# Altium PCB SPI_Board.PcbDoc (part 1 of 2)
Units mil, origin at the board's own origin, x right, y up, seen from the top; angles counter-clockwise.
Board outline 3600 x 5100 mil, 2 copper layers (Top Layer, Bottom Layer); 50 components, 221 nets, 541 pads, 190 vias.
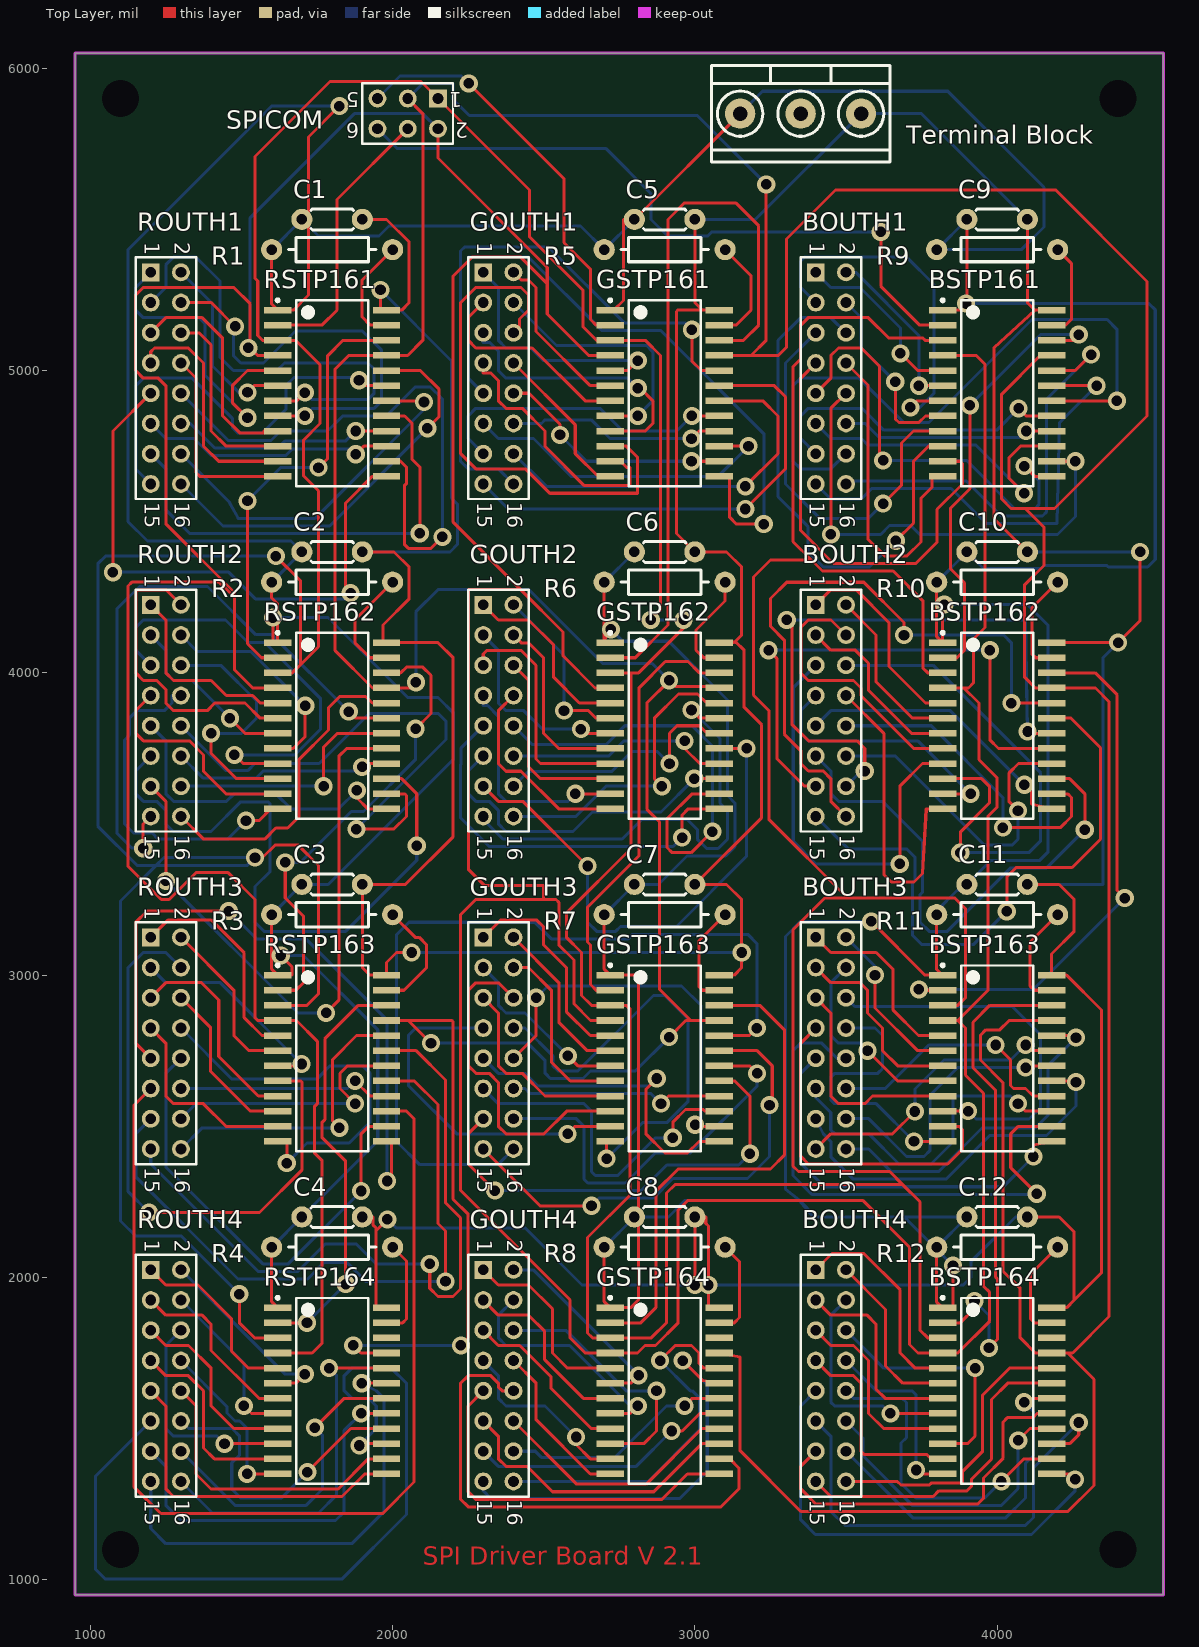
[diagram p0: Top Layer view]
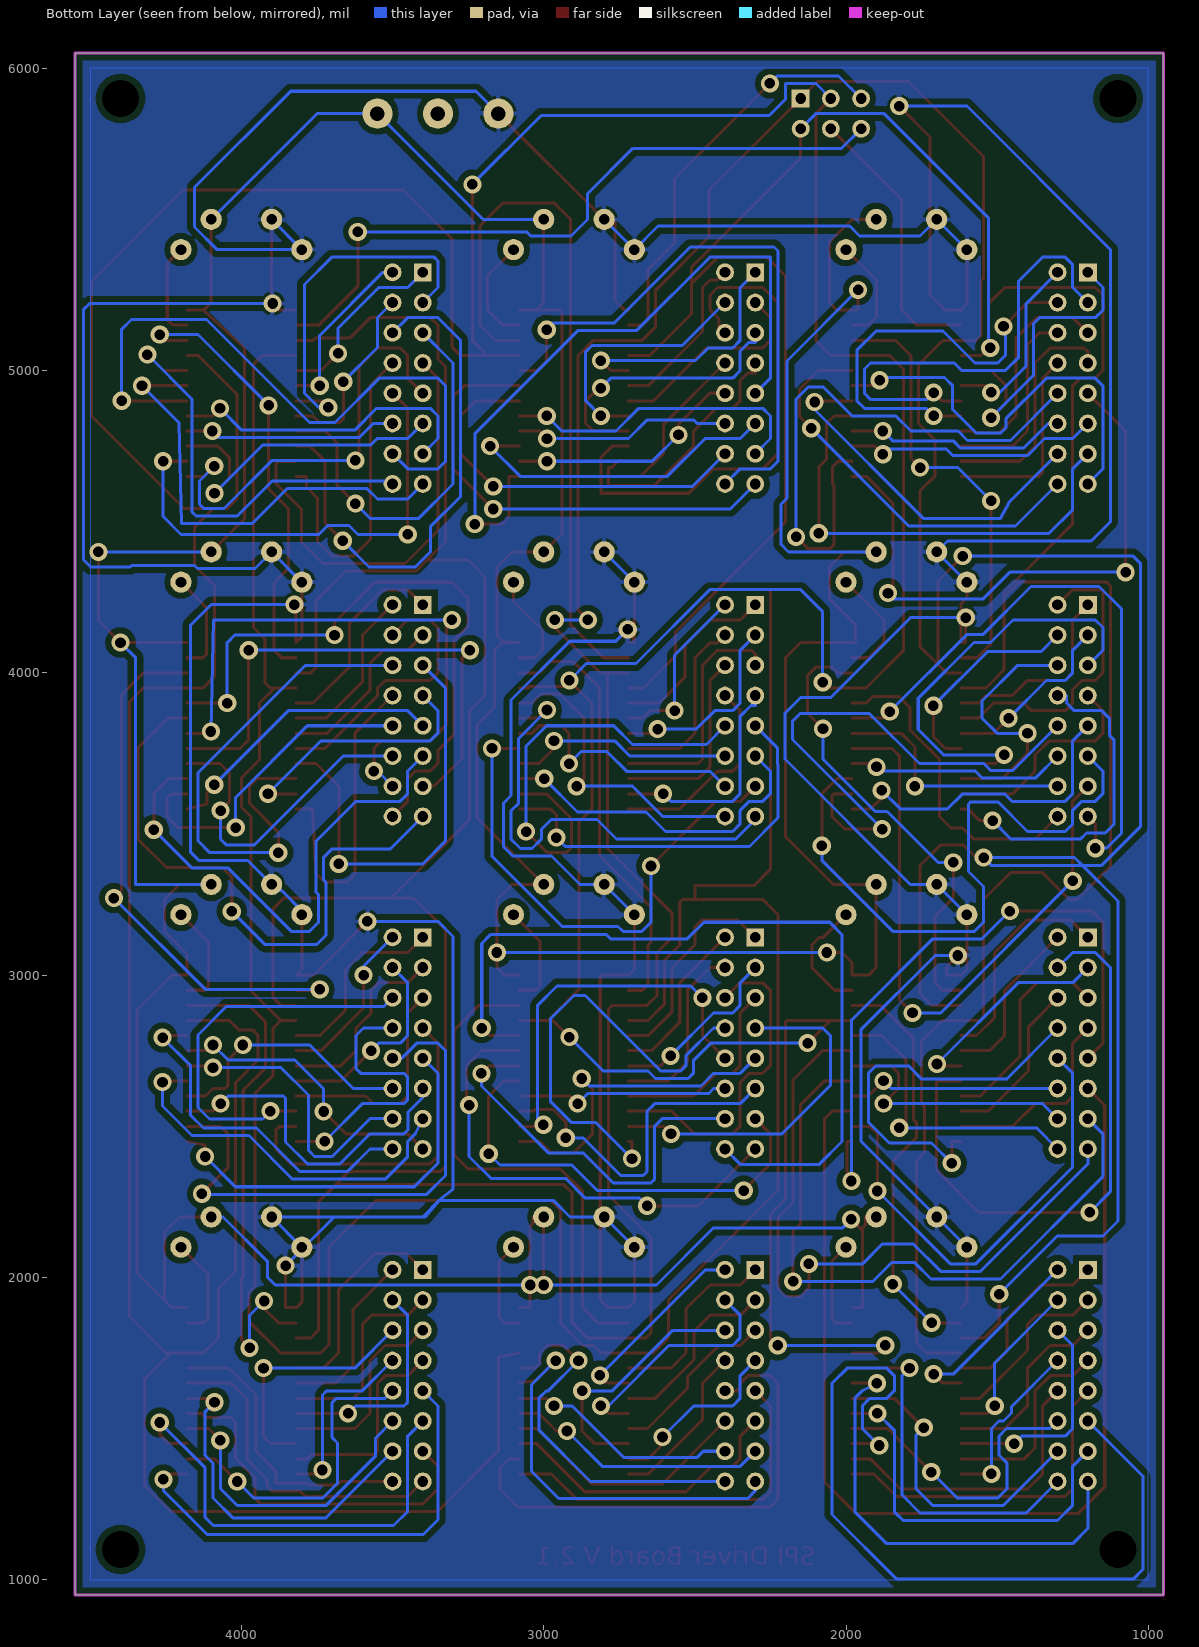
[diagram p1: Bottom Layer view, seen from below]

## Layer stack, top to bottom
Top Layer: signal copper 1.4
Dielectric: dielectric 12.6, FR-4, Dk 4.8
Bottom Layer: signal copper 1.4

## Board outline
950,950 950,6050 4550,6050 4550,950 950,950

## Design rules (kind name [scope] priority, off if disabled: settings)
Clearance poly_rule [InPolygon] p1: gap=20
Clearance [All] p2: gap=15
PolygonConnect [All] p1: connectstyle=Relief reliefconductorwidth=15 reliefentries=4 polygonreliefangle="90 Angle" airgapwidth=10
RoutingTopology [All] p1: topology=Daisy_MidDriven
RoutingVias [All] p1: holewidth=35 width=60 viastyle="Through Hole" minholewidth=35 minwidth=60 maxholewidth=35 maxwidth=60
SolderMaskExpansion [All] p1: expansion=4
Width [All] p1: maxlimit=10 minlimit=10 preferedwidth=10
27 further rules are at their usual default settings.

## Components (designator, comment, footprint, x,y, rotation, side; value= is the part's Value field where it differs from the comment)
BOUTH1 "Header 8X2" HDR2X8 3400,5325 r270 top
BOUTH2 "Header 8X2" HDR2X8 3400,4225 r270 top
BOUTH3 "Header 8X2" HDR2X8 3400,3125 r270 top
BOUTH4 "Header 8X2" HDR2X8 3400,2025 r270 top
BSTP161 "STP16CP05MTR" STP16CP05MTR-24N 4000,4925 r0 top
BSTP162 "STP16CP05MTR" STP16CP05MTR-24N 4000,3825 r0 top
BSTP163 "STP16CP05MTR" STP16CP05MTR-24N 4000,2725 r0 top
BSTP164 "STP16CP05MTR" STP16CP05MTR-24N 4000,1625 r0 top
C1 "Cap" RAD0.2A 1700,5500 r90 top
C2 "Cap" RAD0.2A 1700,4400 r90 top
C3 "Cap" RAD0.2A 1700,3300 r90 top
C4 "Cap" RAD0.2A 1700,2200 r90 top
C5 "Cap" RAD0.2A 2800,5500 r90 top
C6 "Cap" RAD0.2A 2800,4400 r90 top
C7 "Cap" RAD0.2A 2800,3300 r90 top
C8 "Cap" RAD0.2A 2800,2200 r90 top
C9 "Cap" RAD0.2A 3900,5500 r90 top
C10 "Cap" RAD0.2A 3900,4400 r90 top
C11 "Cap" RAD0.2A 3900,3300 r90 top
C12 "Cap" RAD0.2A 3900,2200 r90 top
GOUTH1 "Header 8X2" HDR2X8 2300,5325 r270 top
GOUTH2 "Header 8X2" HDR2X8 2300,4225 r270 top
GOUTH3 "Header 8X2" HDR2X8 2300,3125 r270 top
GOUTH4 "Header 8X2" HDR2X8 2300,2025 r270 top
GSTP161 "STP16CP05MTR" STP16CP05MTR-24N 2900,4925 r0 top
GSTP162 "STP16CP05MTR" STP16CP05MTR-24N 2900,3825 r0 top
GSTP163 "STP16CP05MTR" STP16CP05MTR-24N 2900,2725 r0 top
GSTP164 "STP16CP05MTR" STP16CP05MTR-24N 2900,1625 r0 top
R1 "Res1" AXIAL0.4 2000,5400 r270 top
R2 "Res1" AXIAL0.4 2000,4300 r270 top
R3 "Res1" AXIAL0.4 2000,3200 r270 top
R4 "Res1" AXIAL0.4 2000,2100 r270 top
R5 "Res1" AXIAL0.4 3100,5400 r270 top
R6 "Res1" AXIAL0.4 3100,4300 r270 top
R7 "Res1" AXIAL0.4 3100,3200 r270 top
R8 "Res1" AXIAL0.4 3100,2100 r270 top
R9 "Res1" AXIAL0.4 4200,5400 r270 top
R10 "Res1" AXIAL0.4 4200,4300 r270 top
R11 "Res1" AXIAL0.4 4200,3200 r270 top
R12 "Res1" AXIAL0.4 4200,2100 r270 top
ROUTH1 "Header 8X2" HDR2X8 1200,5325 r270 top
ROUTH2 "Header 8X2" HDR2X8 1200,4225 r270 top
ROUTH3 "Header 8X2" HDR2X8 1200,3125 r270 top
ROUTH4 "Header 8X2" HDR2X8 1200,2025 r270 top
RSTP161 "STP16CP05MTR" STP16CP05MTR-24N 1800,4925 r0 top
RSTP162 "STP16CP05MTR" STP16CP05MTR-24N 1800,3825 r0 top
RSTP163 "STP16CP05MTR" STP16CP05MTR-24N 1800,2725 r0 top
RSTP164 "STP16CP05MTR" STP16CP05MTR-24N 1800,1625 r0 top
SPICOM "Header 3X2" HDR2X3 2150,5900 r180 top
"Terminal Block" "3 way Terminal Block" PCTB3N 3550,5850 r180 top

## Footprints (in the part's own frame and the unit in brackets; to place one, negate y for a bottom-side part, rotate by r counter-clockwise, add the part's x,y. Pads: shape width x height; smd on the part's side, far side on the other; paste and mask are expansions set on the pad)
AXIAL0.4 [mil]
  round 70 hole 35: 1(0,0) 2(0,-400)
  silkscreen extent -40,-345 40,-55
HDR2X3 [mm] "Connector; Header; 3x2 Position"
  rect 1.5x1.5 hole 0.9: 1(0,0)
  round 1.5 hole 0.9: 2(0,2.54) 3(2.54,0) 4(2.54,2.54) 5(5.08,0) 6(5.08,2.54)
  silkscreen extent -1.27,-1.27 6.35,3.81
HDR2X8 [mm] "Connector; Header; 8x2 Position"
  rect 1.5x1.5 hole 0.9: 1(0,0)
  round 1.5 hole 0.9: 2(0,2.54) 3(2.54,0) 4(2.54,2.54) 5(5.08,0) 6(5.08,2.54) 7(7.62,0) 8(7.62,2.54) 9(10.16,0) 10(10.16,2.54) 11(12.7,0) 12(12.7,2.54) 13(15.24,0) 14(15.24,2.54) 15(17.78,0) 16(17.78,2.54)
  silkscreen extent -1.27,-1.27 19.05,3.81
PCTB3N [mil]
  round 100 hole 48: 1(0,0) 2(200,0) 3(400,0)
  silkscreen extent -95,-160 495,160
RAD0.2A [mil]
  round 70 hole 35: 1(0,0) 2(0,-200)
  silkscreen extent -35,-170 35,-30
STP16CP05MTR-24N [mm] "SOIC, 24-Leads, Body 15.40x7.50mm, Pitch 1.27mm, IPC Medium Density"
  rect 2.3x0.55 smd: 1(-4.575,6.985) 2(-4.575,5.715) 3(-4.575,4.445) 4(-4.575,3.175) 5(-4.575,1.905) 6(-4.575,0.635) 7(-4.575,-0.635) 8(-4.575,-1.905) 9(-4.575,-3.175) 10(-4.575,-4.445) 11(-4.575,-5.715) 12(-4.575,-6.985) 13(4.575,-6.985) 14(4.575,-5.715) 15(4.575,-4.445) 16(4.575,-3.175) 17(4.575,-1.905) 18(4.575,-0.635) 19(4.575,0.635) 20(4.575,1.905) 21(4.575,3.175) 22(4.575,4.445) 23(4.575,5.715) 24(4.575,6.985)
  silkscreen extent -4.7,-7.8 3.02,7.93, body extent -3.8,-7.8 3.8,7.8, height 2.65

## Part data
BOUTH1 BOUTH2 BOUTH3 BOUTH4 GOUTH1 GOUTH2 GOUTH3 GOUTH4 ROUTH1 ROUTH2 ROUTH3 ROUTH4: "Header, 8-Pin, Dual row"
C1 C2 C3 C4 C5 C6 C7 C8 C9 C10 C11 C12: "Capacitor"
R1 R2 R3 R4 R5 R6 R7 R8 R9 R10 R11 R12: "Resistor"
SPICOM: "Header, 3-Pin, Dual row"
"Terminal Block": library part Component_1

## Free pads (board coordinates)
  round 60 hole 123: 0(4400,5900) 1(4400,1100) 2(1100,1100) 3(1100,5900)

## Via types
v1: diameter 60, hole 35, Top Layer to Bottom Layer, 190 vias

## Nets (pads, with @x,y where several pads share a name; then routed paths per layer and width w, separated by ;. In a path a pad name is that pad's centre, name@x,y a point inside that pad or via, vN(x,y) a via of type N, cw(c..) or ccw(c..) an arc to the next point about the centre after c; other vN are vias at no path point)
3.3VCC: "Terminal Block.1" BSTP161.24 BSTP162.24 BSTP163.24 BSTP164.24 C1.2 C2.2 C3.2 C4.2 C5.2 C6.2 C7.2 C8.2 C9.2 C10.2 C11.2 C12.2 GSTP161.24 GSTP162.24 GSTP163.24 GSTP164.24 RSTP161.24 RSTP162.24 RSTP163.24 RSTP164.24 | length 18453.1
  Top Layer w10: C4.2@1900,2200 1936,2200 1936,2173 1945,2164 1945,2154 ; C2.2@1900,4400 2005,4400 2055,4350 2055,4245 1968,4158 1968,4100 RSTP162.24@1980.12,4100 2150.47,4100 2200.47,4050 2200.47,3458.23 2042.24,3300 C3.2@1900,3300 1900,3025 1925,3000 RSTP163.24@1980.12,3000 1980.12,3042.12 2013,3075 v1(2063,3075) ; C1.2@1900,5500 1980,5500 2055,5425 2055,5225 2030,5200 RSTP161.24@1980.12,5200 1960,5200 v1(1960,5267) ; RSTP164.24@1980.12,1900 1945,1900 1945,2154 ; v1(1983,2192) 1945,2154 ; v1(3000,1975) C8.2@3000,2200 3036,2200 3036,2179 3045,2170 v1(3045,1975) 3045,1900 GSTP164.24@3080.12,1900 ; C5.2@3000,5500 3000,5225 3025,5200 ; GSTP163.24@3080.12,3000 3130,3000 3155,3025 v1(3155,3075) 3155,3250 3105,3300 C7.2@3000,3300 3221,3521 3221,3828 3163,3886 3163,4075 3134,4104 ; GSTP161.24@3080.12,5200 3025,5200 ; C12.2@4100,2200 4205,2200 4255,2150 4255,1925 ; C11.2@4100,3300 4205,3300 4255,3250 4255,3145 4180,3070 4180,3000 BSTP163.24@4180.12,3000 4230,3000 4345.39,2884.61 4345.39,2015.39 4255,1925 ; C10.2@4100,4400 3989.84,4510.16 3989.84,5075.84 4125,5200 ; C9.2@4100,5500 4100,5225 4125,5200 ; BSTP164.24@4180.12,1900 4230,1900 4255,1925 ; BSTP162.24@4180.12,4100 v1(4400,4100) 4473,4173 v1(4473,4400) ; BSTP161.24@4180.12,5200 4125,5200 ; 3025,5200 2943.35,5200 2939,5195.65 2939,4461 C6.2@3000,4400 3105,4400 3155,4350 3155,4125 3134,4104 ; 3134,4104 3130,4100 GSTP162.24@3080.12,4100 3134,4104
  Bottom Layer w10: C2.2@1900,4400 2190,4400 2215,4425 2215,4558 2195,4578 2195,5032 v1(1960,5267) ; v1(1983,2192) 2011,2164 2438,2164 2627,1975 v1(3000,1975) ; v1(2063,3075) v1(3155,3075) ; C5.2@3000,5500 3200,5500 3550,5850 3750,5850 C9.2@4100,5500 ; v1(3045,1975) 3888,1975 3913,2000 3913,2052 4061,2200 C12.2@4100,2200 ; C11.2@4100,3300 4350,3300 4350,4050 v1(4400,4100) ; C10.2@4100,4400 v1(4473,4400)
BLUESPI: BSTP161.2 SPICOM.6 | length 2306
  Top Layer w10: v1(3615,5459) 3615,5279 3744,5150 BSTP161.2@3819.88,5150
  Bottom Layer w10: SPICOM.6@1950,5800 2015,5735 2705,5735 2855,5585 2855,5500 2910,5445 3043,5445 3057,5459 v1(3615,5459)
BLUESPIOUT1: BSTP161.22 BSTP162.2 | length 1493.7
  Top Layer w10: BSTP162.2@3819.88,4050 3867,4050 3892,4075 3892,4298 3845,4345 3845,4544 3910.16,4609.16 3910.16,4884.84 v1(3910,4885) ; BSTP161.22@4180.12,5100 4251,5100 v1(4270,5119)
  Bottom Layer w10: v1(3910,4885) 4144,5119 v1(4270,5119)
BLUESPIOUT2: BSTP162.22 BSTP163.2 | length 1815.9
  Top Layer w10: v1(3741,2953) 3744,2950 BSTP163.2@3819.88,2950 ; BSTP162.22@4180.12,4000 4324.31,4000 4397,3927.31 4397,3280 v1(4422,3255)
  Bottom Layer w10: v1(3741,2953) 4120,2953 v1(4422,3255)
BLUESPIOUT3: BSTP163.22 BSTP164.2 | length 1729.2
  Top Layer w10: BSTP164.2@3819.88,1850 3877.5,1850 3925,1897.5 v1(3925,1922) ; v1(3973,1767) 4000.46,1794.46 4000.46,1996 3994,2002.46 3994,2620 3920,2694 3920,2844 3976,2900 BSTP163.22@4180.12,2900
  Bottom Layer w10: v1(3925,1922) 3973,1874 v1(3973,1767)
BOUT0: BOUTH1.1 BSTP161.5 | length 603.7
  Top Layer w10: v1(3680,5057) 3737,5000 BSTP161.5@3819.88,5000
  Bottom Layer w10: BOUTH1.1@3400,5325 3450,5275 3546,5275 3680,5141 v1(3680,5057)
BOUT1: BOUTH1.2 BSTP161.6 | length 572.6
  Top Layer w10: v1(3741,4950) BSTP161.6@3819.88,4950
  Bottom Layer w10: BOUTH1.2@3500,5325 3532.3,5325 3741,5116.3 v1(3741,4950)
BOUT2: BOUTH1.3 BSTP161.7 | length 1215.1
  Top Layer w10: v1(3713,4878) 3735,4900 BSTP161.7@3819.88,4900
  Bottom Layer w10: BOUTH1.3@3400,5225 3350,5275 3350,5362.5 3362.5,5375 3701,5375 3791,5285 3791,4925 3744,4878 v1(3713,4878)
BOUT3: BOUTH1.4 BSTP161.8 | length 623.5
  Top Layer w10: v1(3663,4963) 3663,4840 3675,4828 3741,4828 3763,4850 BSTP161.8@3819.88,4850
  Bottom Layer w10: BOUTH1.4@3500,5225 3549.53,5175.47 3549.53,5076.47 v1(3663,4963)
BOUT4: BOUTH1.5 BSTP161.9 | length 1311.1
  Top Layer w10: v1(3623,4560) 3683.36,4620.36 3683.36,4760.36 3723,4800 BSTP161.9@3819.88,4800
  Bottom Layer w10: BOUTH1.5@3400,5125 3300,5025 3300,4625 3415,4510 3573,4510 v1(3623,4560)
BOUT5: BOUTH1.6 BSTP161.10 | length 1769.6
  Top Layer w10: v1(3665,4437) 3723,4495 3723,4700 3773,4750 BSTP161.10@3819.88,4750
  Bottom Layer w10: BOUTH1.6@3500,5125 3450,5175 3350,5175 3275,5100 3275,4583 3375,4483 3375,4400 3425,4350 3578,4350 v1(3665,4437)
BOUT6: BOUTH1.7 BSTP161.11 | length 1463.2
  Top Layer w10: BOUTH1.7@3400,5025 3350,4975 3350,4470.95 3458.95,4362 3731,4362 3801,4432 3801,4540.84 3885.16,4625 3885.16,4691.84 3877,4700 BSTP161.11@3819.88,4700
BOUT7: BOUTH1.8 BSTP161.12 | length 1097.3
  Top Layer w10: BOUTH1.8@3500,5025 3573,4952 3573,4442 3628,4387 3702,4387 3748,4433 3748,4578 3785,4615 3785,4650 BSTP161.12@3819.88,4650
BOUT8: BOUTH1.9 BSTP161.13 | length 1496.5
  Top Layer w10: BOUTH1.9@3400,4925 3450,4975 3450,5050 3475,5075 3550,5075 3611,5014 3611,4715 v1(3623,4703) ; v1(4090,4684) 4124,4650 BSTP161.13@4180.12,4650
  Bottom Layer w10: v1(3623,4703) 3898.5,4703 4057.5,4544 4125,4544 4139,4558 4139,4635 v1(4090,4684)
BOUT9: BOUTH1.10 BSTP161.14 | length 1607.4
  Top Layer w10: v1(3450,4458) 3450,4875 BOUTH1.10@3500,4925 ; BSTP161.14@4180.12,4700 v1(4259,4700)
  Bottom Layer w10: v1(3450,4458) 3614.66,4458 3644.02,4487.37 3714.66,4487.37 3744.02,4458 4200,4458 4259,4517 v1(4259,4700)
BOUT10: BOUTH1.11 BSTP161.15 | length 1079.1
  Top Layer w10: v1(4089,4594) 4040,4643 4040,4712.5 4077.5,4750 BSTP161.15@4180.12,4750
  Bottom Layer w10: BOUTH1.11@3400,4825 3450,4775 3551,4775 3573,4753 3930,4753 v1(4089,4594)
BOUT11: BOUTH1.12 BSTP161.16 | length 708.7
  Top Layer w10: v1(4096,4800) BSTP161.16@4180.12,4800
  Bottom Layer w10: BOUTH1.12@3500,4825 3564,4825 3611,4778 4074,4778 v1(4096,4800)
BOUT12: BOUTH1.13 BSTP161.17 | length 1056.2
  Top Layer w10: v1(4071,4875) 4096,4850 BSTP161.17@4180.12,4850
  Bottom Layer w10: BOUTH1.13@3400,4725 3350,4775 3350,4850 3375,4875 3553,4875 3625,4803 3999,4803 v1(4071,4875)
BOUT13: BOUTH1.14 BSTP161.18 | length 2205.7
  Top Layer w10: BSTP161.18@4180.12,4900 v1(4396,4900)
  Bottom Layer w10: BOUTH1.14@3500,4725 3450,4675 3350,4675 3325,4700 3325,4950 3350,4975 3543.78,4975 3690.78,4828 3774.49,4828 4115.49,5169 4364,5169 4396,5137 v1(4396,4900)
BOUT14: BOUTH1.15 BSTP161.19 | length 1536.8
  Top Layer w10: BSTP161.19@4180.12,4950 v1(4329,4950)
  Bottom Layer w10: BOUTH1.15@3400,4625 3450,4575 3550,4575 3585,4610 3848,4610 3964,4494 4198,4494 4207,4828 v1(4329,4950)
BOUT15: BOUTH1.16 BSTP161.20 | length 1461.6
  Top Layer w10: BSTP161.20@4180.12,5000 4258,5000 v1(4311,5053)
  Bottom Layer w10: BOUTH1.16@3500,4625 3524.53,4625 3524.53,4635 3898,4635 4014,4519 4150,4519 4164,4533 4164,4906 v1(4311,5053)
BOUT16: BOUTH2.1 BSTP162.5 | length 680.5
  Top Layer w10: BOUTH2.1@3400,4225 3449.53,4274.53 3533.47,4274.53 3642,4166 3642,4021 3763,3900 BSTP162.5@3819.88,3900
BOUT17: BOUTH2.2 BSTP162.6 | length 566
  Top Layer w10: BOUTH2.2@3500,4225 3599.53,4125.47 3599.53,3970.47 3720,3850 BSTP162.6@3819.88,3850
BOUT18: BOUTH2.3 BSTP162.7 | length 606.8
  Top Layer w10: BOUTH2.3@3400,4125 3450,4075 3531,4075 3574.53,4031.47 3574.53,3942.26 3716.79,3800 BSTP162.7@3819.88,3800
BOUT19: BOUTH2.4 BSTP162.8 | length 918.4
  Top Layer w10: BOUTH2.4@3500,4125 3450.47,4174.53 3375,4174.53 3350.47,4150 3350.47,3999.53 3375,3975 3524.53,3975 3549.53,3950 3549.53,3924.53 3724.06,3750 BSTP162.8@3819.88,3750
BOUT20: BOUTH2.5 BSTP162.9 | length 1426.7
  Top Layer w10: v1(3678,3368) 3678,3625 3753,3700 BSTP162.9@3819.88,3700
  Bottom Layer w10: BOUTH2.5@3400,4025 3325.47,3950.47 3325.47,3442.53 3400,3368 v1(3678,3368)
BOUT21: BOUTH2.6 BSTP162.10 | length 1722.9
  Top Layer w10: BSTP162.10@3819.88,3650 3949,3650 3974,3625 3974,3569.17 3878,3473.17 v1(3878,3405)
  Bottom Layer w10: BOUTH2.6@3500,4025 3788.17,4025 4144,3669.17 4144,3444.17 4104.83,3405 v1(3878,3405)
BOUT22: BOUTH2.7 BSTP162.11 | length 882
  Top Layer w10: BSTP162.11@3819.88,3600 v1(3912,3600)
  Bottom Layer w10: BOUTH2.7@3400,3925 3350.47,3875.47 3350.47,3800 3375.47,3775 3737,3775 v1(3912,3600)
BOUT23: BOUTH2.8 BSTP162.12 | length 1062.5
  Top Layer w10: BOUTH2.8@3500,3925 3625,3800 3625,3333 3650,3308 3725,3308 3753,3336 3765.5,3550 BSTP162.12@3819.88,3550
BOUT24: BOUTH2.9 BSTP162.13 | length 954.2
  Top Layer w10: v1(4090,3630) 4114,3606 4114,3566 BSTP162.13@4180.12,3550
  Bottom Layer w10: BOUTH2.9@3400,3825 3450,3875 3845,3875 v1(4090,3630)
BOUT25: BOUTH2.10 BSTP162.14 | length 1093.1
  Top Layer w10: v1(4019,3488) 4209,3488 4246,3525 4246,3587.5 4233.5,3600 BSTP162.14@4180.12,3600
  Bottom Layer w10: BOUTH2.10@3500,3825 3782,3825 4019,3588 v1(4019,3488)
BOUT26: BOUTH2.11 BSTP162.15 | length 1731.3
  Top Layer w10: BSTP162.15@4180.12,3650 4240,3650 4290,3600 v1(4290,3481)
  Bottom Layer w10: BOUTH2.11@3400,3725 3450,3675 3450,3600 3475,3575 3621,3575 3753,3443 3753,3274 3745,3266 3745,3175 3775,3145 3835,3145 4045,3355 4164,3355 v1(4290,3481)
BOUT27: BOUTH2.12 BSTP162.16 | length 1083.8
  Top Layer w10: v1(4069,3544.17) 4039.84,3573.33 4039.84,3669.17 4070.67,3700 BSTP162.16@4180.12,3700
  Bottom Layer w10: BOUTH2.12@3500,3725 3663.17,3725 3958.17,3430 4049,3430 4069,3450 v1(4069,3544.17)
BOUT28: BOUTH2.13 BSTP162.17 | length 1780.6
  Top Layer w10: v1(3244,4075) 3271,4048 3271,3716.97 3362.97,3625 BOUTH2.13@3400,3625 ; v1(3976,4075) 3976,3778.65 4004.65,3750 BSTP162.17@4180.12,3750
  Bottom Layer w10: v1(3244,4075) v1(3976,4075)
BOUT29: BOUTH2.14 BSTP162.18 | length 2023.6
  Top Layer w10: v1(3304,4175) 3321,4158 3321,3830 3376,3775 3537,3775 3562,3750 v1(3562,3675) ; v1(4101,3806) 4107,3800 BSTP162.18@4180.12,3800
  Bottom Layer w10: v1(3304,4175) 4093,4175 v1(4101,3806) ; BOUTH2.14@3500,3625 3550,3675 v1(3562,3675)
BOUT30: BOUTH2.15 BSTP162.19 | length 1995.1
  Top Layer w10: v1(4032,3211) 4032,3325 4063,3356 4248,3356 4342,3450 4342,3752 4244,3850 BSTP162.19@4180.12,3850
  Bottom Layer w10: BOUTH2.15@3400,3525 3507,3418 3700,3418 3728,3390 3728,3315 3720,3307 3720,3132 3750,3102 3923,3102 v1(4032,3211)
BOUT31: BOUTH2.16 BSTP162.20 | length 2113.1
  Top Layer w10: BOUTH2.16@3500,3525 3450,3575 3450,3650 3425,3675 3375.47,3675 3350.47,3700 3350.47,3742.53 3296,3797 3296,4108 3250,4154 3250,4246 3303.75,4299.75 3558.89,4299.75 3692,4166.64 v1(3692,4125) ; v1(4047,3900) BSTP162.20@4180.12,3900
  Bottom Layer w10: v1(3692,4125) 4022,4125 4047,4100 v1(4047,3900)
BOUT32: BOUTH3.1 BSTP163.5 | length 633.6
  Top Layer w10: BOUTH3.1@3400,3125 3450,3075 3600,3075 3656,3019 3656,2884 3740,2800 BSTP163.5@3819.88,2800
BOUT33: BOUTH3.2 BSTP163.6 | length 556.1
  Top Layer w10: v1(3596,3000) 3596,2891 3737,2750 BSTP163.6@3819.88,2750
  Bottom Layer w10: BOUTH3.2@3500,3125 3596,3029 v1(3596,3000)
BOUT34: BOUTH3.3 BSTP163.7 | length 642.4
  Top Layer w10: BOUTH3.3@3400,3025 3450,2975 3546,2975 3571,2950 3571,2875 3621,2825 3621,2750 3671,2700 BSTP163.7@3819.88,2700
BOUT35: BOUTH3.4 BSTP163.8 | length 677.7
  Top Layer w10: v1(3571,2750) 3671,2650 BSTP163.8@3819.88,2650
  Bottom Layer w10: BOUTH3.4@3500,3025 3450,2975 3450,2800 3475,2775 3546,2775 v1(3571,2750)
BOUT36: BOUTH3.5 BSTP163.9 | length 736.3
  Top Layer w10: BOUTH3.5@3400,2925 3450,2875 3450,2600 3475,2575 3563,2575 3588,2600 BSTP163.9@3819.88,2600
BOUT37: BOUTH3.6 BSTP163.10 | length 1285.1
  Top Layer w10: BSTP163.10@3819.88,2550 v1(3904,2550)
  Bottom Layer w10: BOUTH3.6@3500,2925 3529,2896 4050,2896 4144,2802 4144,2562.5 4105.67,2524.17 3929.83,2524.17 v1(3904,2550)
BOUT38: BOUTH3.7 BSTP163.11 | length 1145.9
  Top Layer w10: BOUTH3.7@3400,2825 3350,2775 3350,2400.47 3375,2375.47 3836.47,2375.47 3886,2425 3886,2487.5 3873.5,2500 BSTP163.11@3819.88,2500
BOUT39: BOUTH3.8 BSTP163.12 | length 925.2
  Top Layer w10: v1(3725,2450) BSTP163.12@3819.88,2450
  Bottom Layer w10: BOUTH3.8@3500,2825 3596,2825 3621,2800 3621,2690.72 3605.28,2675 3462.5,2675 3450,2662.5 3450,2587.5 3462.5,2575 3600,2575 v1(3725,2450)
BOUT40: BOUTH3.9 BSTP163.13 | length 1310.3
  Top Layer w10: v1(4120,2400) 4120,2437.5 BSTP163.13@4180.12,2450
  Bottom Layer w10: BOUTH3.9@3400,2725 3350,2675 3350,2378 3428,2300 4020,2300 v1(4120,2400)
BOUT41: BOUTH3.10 BSTP163.14 | length 1830.7
  Top Layer w10: v1(4131,2277) 4045,2363 4045,2475 4070,2500 BSTP163.14@4180.12,2500
  Bottom Layer w10: BOUTH3.10@3500,2725 3470.04,2725 3420.04,2775 3350,2775 3325,2750 3325,2337 3387,2275 4129,2275 v1(4131,2277)
BOUT42: BOUTH3.11 BSTP163.15 | length 1133.8
  Top Layer w10: v1(4069,2575) 4094,2550 BSTP163.15@4180.12,2550
  Bottom Layer w10: BOUTH3.11@3400,2625 3400,2595.04 3449.53,2545.52 3449.53,2488 3462.53,2475 3575,2475 3675,2375 3781,2375 3854,2448 3854,2593 3861,2600 4044,2600 v1(4069,2575)
BOUT43: BOUTH3.12 BSTP163.16 | length 859.6
  Top Layer w10: v1(3995,2769) 4044,2720 4044,2635 4054,2625 4094,2625 4119,2600 BSTP163.16@4180.12,2600
  Bottom Layer w10: BOUTH3.12@3500,2625 3630,2625 3774,2769 v1(3995,2769)
BOUT44: BOUTH3.13 BSTP163.17 | length 1245.7
  Top Layer w10: BSTP163.17@4180.12,2650 4257,2650 v1(4261,2646)
  Bottom Layer w10: BOUTH3.13@3400,2525 3425,2475 3450,2450 3450,2399 3524,2325 3831,2325 3975.17,2469.17 4163.17,2469.17 4261,2567 v1(4261,2646)
BOUT45: BOUTH3.14 BSTP163.18 | length 963.4
  Top Layer w10: v1(4094,2694) 4100,2700 BSTP163.18@4180.12,2700
  Bottom Layer w10: BOUTH3.14@3500,2525 3575,2525 3700,2400 3758,2400 3778.28,2420.28 3778.28,2603.28 3869,2694 v1(4094,2694)
BOUT46: BOUTH3.15 BSTP163.19 | length 973.8
  Top Layer w10: BOUTH3.15@3400,2425 3450,2475 3654,2475 v1(3728,2549) ; v1(4094,2769) 4113,2750 BSTP163.19@4180.12,2750
  Bottom Layer w10: v1(3728,2549) 3728,2623 3824,2719 4044,2719 v1(4094,2769)
BOUT47: BOUTH3.16 BSTP163.20 | length 1154.9
  Top Layer w10: BSTP163.20@4180.12,2800 4254,2800 v1(4260.75,2793.25)
  Bottom Layer w10: BOUTH3.16@3500,2425 3575,2425 3650,2350 3806,2350 3950.17,2494.17 4125.67,2494.17 4169,2537.5 4169,2701.5 v1(4260.75,2793.25)
BOUT48: BOUTH4.1 BSTP164.5 | length 721.7
  Top Layer w10: BOUTH4.1@3400,2025 3454,2079 3559,2079 3679,1959 3679,1750 3729,1700 BSTP164.5@3819.88,1700
BOUT49: BOUTH4.2 BSTP164.6 | length 584.8
  Top Layer w10: BOUTH4.2@3500,2025 3631,1894 3631,1707 3688,1650 BSTP164.6@3819.88,1650
BOUT50: BOUTH4.3 BSTP164.7 | length 680.6
  Top Layer w10: BOUTH4.3@3400,1925 3450,1875 3570,1875 3599.53,1845.47 3599.53,1630.27 3629.8,1600 BSTP164.7@3819.88,1600
BOUT51: BOUTH4.4 BSTP164.8 | length 743.6
  Top Layer w10: v1(3647,1550) BSTP164.8@3819.88,1550
  Bottom Layer w10: BOUTH4.4@3500,1925 3450,1875 3450,1587.5 3462.5,1575 3622,1575 v1(3647,1550)
BOUT52: BOUTH4.5 BSTP164.9 | length 657.3
  Top Layer w10: BOUTH4.5@3400,1825 3450,1775 3525,1775 3574.53,1725.47 3574.53,1550 3624.53,1500 BSTP164.9@3819.88,1500
BOUT53: BOUTH4.6 BSTP164.10 | length 821.3
  Top Layer w10: BSTP164.10@3819.88,1450 3902,1450 3927,1475 v1(3927,1700)
  Bottom Layer w10: BOUTH4.6@3500,1825 3625,1700 v1(3927,1700)
BOUT54: BOUTH4.7 BSTP164.11 | length 686.3
  Top Layer w10: BOUTH4.7@3400,1725 3450,1675 3524.53,1675 3549.53,1650 3549.53,1425 3560.82,1413.71 3768.29,1413.71 3782,1400 BSTP164.11@3819.88,1400
BOUT55: BOUTH4.8 BSTP164.12 | length 620.6
  Top Layer w10: v1(3732,1363) 3745,1350 BSTP164.12@3819.88,1350
  Bottom Layer w10: BOUTH4.8@3500,1725 3600,1625 3718.18,1625 3732,1611.18 v1(3732,1363)
BOUT56: BOUTH4.9 BSTP164.13 | length 1559
  Top Layer w10: BSTP164.13@4180.12,1350 4240,1350 v1(4258,1332)
  Bottom Layer w10: BOUTH4.9@3400,1625 3350,1575 3350,1198 3398.49,1149.51 4113.51,1149.51 4258,1294 v1(4258,1332)
BOUT57: BOUTH4.10 BSTP164.14 | length 1062.9
  Top Layer w10: v1(4014,1325) 4089,1400 BSTP164.14@4180.12,1400
  Bottom Layer w10: BOUTH4.10@3500,1625 3525,1600 3686,1600 3700,1586 3700,1470 3682,1452 3682,1319 3731,1270 3959,1270 v1(4014,1325)
BOUT58: BOUTH4.11 BSTP164.15 | length 1538.9
  Top Layer w10: BSTP164.15@4180.12,1450 4240,1450 4270,1480 v1(4270,1520)
  Bottom Layer w10: BOUTH4.11@3400,1525 3450,1475 3450,1226 3497,1179 4093.1,1179 4120,1205.9 4120,1370 v1(4270,1520)
BOUT59: BOUTH4.12 BSTP164.16 | length 1029.6
  Top Layer w10: v1(4070,1461) 4109,1500 BSTP164.16@4180.12,1500
  Bottom Layer w10: BOUTH4.12@3500,1525 3556,1469 3556,1409.64 3720.64,1245 4013,1245 4069,1301 4069,1460 v1(4070,1461)
BOUT60: BOUTH4.13 BSTP164.17 | length 1230.1
  Top Layer w10: BOUTH4.13@3400,1425 3350,1375 3350,1300.47 3400,1250.47 3935.98,1250.47 3954.57,1269.06 3954.57,1336.57 4019.88,1401.88 4019.88,1522.1 4033.78,1536 4118,1536 4132,1550 BSTP164.17@4180.12,1550
BOUT61: BOUTH4.14 BSTP164.18 | length 1149.5
  Top Layer w10: v1(4089,1587) 4102,1600 BSTP164.18@4180.12,1600
  Bottom Layer w10: BOUTH4.14@3500,1425 3720.46,1204.54 4028.54,1204.54 4094,1270 4094,1384.86 4120,1410.86 4120,1556 v1(4089,1587)
BOUT62: BOUTH4.15 BSTP164.19 | length 1085.1
  Top Layer w10: BOUTH4.15@3400,1325 3449.53,1275.47 3788.3,1275.47 3807,1294.17 3900,1294.17 3915.54,1309.71 3915.54,1332.9 3981.38,1398.74 3981.38,1596.38 4035,1650 BSTP164.19@4180.12,1650
BOUT63: BOUTH4.16 BSTP164.20 | length 977.7
  Top Layer w10: BOUTH4.16@3500,1325 3670,1325 3682,1313 3775.83,1313 3782,1319.17 3886,1319.17 3886,1359 3952,1425 3952,1611 4041,1700 BSTP164.20@4180.12,1700
CLK: BSTP161.3 BSTP162.3 BSTP163.3 BSTP164.3 GSTP161.3 GSTP162.3 GSTP163.3 GSTP164.3 RSTP161.3 RSTP162.3 RSTP163.3 RSTP164.3 SPICOM.1 | length 21090.1
  Top Layer w10: v1(1493,1945) 1493,1850 1543,1800 RSTP164.3@1619.88,1800 ; v1(1545,3389) 1570,3389 1611,3430 1688,3430 1755,3363 1755,2938 1717,2900 RSTP163.3@1619.88,2900 ; v1(1614,4386) 1696,4304 1696,4027.5 ; RSTP162.3@1619.88,4000 1668.5,4000 1696,4027.5 ; GSTP162.3@2719.88,4000 2782,4000 ; v1(2854,4175) 2886,4207 2886,5050 2836,5100 GSTP161.3@2719.88,5100 2674.34,5100 2629.61,5144.73 2629.61,5265.88 2453,5442.49 2453,5597 SPICOM.1@2150,5900 2094,5956 1792.89,5956 1545,5708.11 1545,5305 1554,5296 1554,5116 1570,5100 RSTP161.3@1619.88,5100 1679,5100 1760.16,5018.84 1760.16,4825 1705,4769.84 1705,4652 1755,4602 1755,4086.5 1696,4027.5 ; v1(2963,4175) 2963,4149 2814,4000 2782,4000 ; BSTP164.3@3819.88,1800 3770,1800 3745,1825 3745,2250 3688,2307 ; BSTP163.3@3819.88,2900 3870,2900 3895,2925 3895,3220 3860,3255 3505,3255 ; BSTP162.3@3819.88,4000 3770,4000 3754,4016 3754,4239 3656,4337 3421.95,4337 3385.95,4373 ; BSTP161.3@3819.88,5100 3762,5100 3755,5107 3642,5107 3574,5175 3375,5175 3350,5150 3350,5038 3325,5013 3325,4433.95 3385.95,4373 ; 2782,4000 2789,3993 2789,3419 2575,3205 2575,3125 2625,3075 2625,2933 2658,2900 GSTP163.3@2719.88,2900 2773.5,2900 2786,2887.5 2786,2273 2645,2132 2645,1816.5 2661.5,1800 GSTP164.3@2719.88,1800 2856,1800 2906,1850 2906,2279 2934,2307 3688,2307 ; 3385.95,4373 3250,4373 3194,4317 3194,3926 3246,3874 3246,3514 3505,3255 ; 3505,3255 3430,3255 3325,3150 3325,2368 3342.53,2350.47 3644.53,2350.47 3688,2307
  Bottom Layer w10: v1(1493,1945) 1301,2137 1150,2137 1100,2187 1100,3245 1217,3362 ; v1(1614,4386) 1050,4386 1025,4361 1025,3493 1156,3362 1217,3362 ; v1(2854,4175) v1(2963,4175) ; 1217,3362 1518,3362 v1(1545,3389) 1244,3389 1217,3362
GND: "Terminal Block.3" BSTP161.1 BSTP162.1 BSTP163.1 BSTP164.1 C1.1 C2.1 C3.1 C4.1 C5.1 C6.1 C7.1 C8.1 C9.1 C10.1 C11.1 C12.1 GSTP161.1 GSTP162.1 GSTP163.1 GSTP164.1 R1.2 R2.2 R3.2 R4.2 R5.2 R6.2 R7.2 R8.2 R9.2 R10.2 R11.2 R12.2 RSTP161.1 RSTP162.1 RSTP163.1 RSTP164.1 | length 23414.7
  Top Layer w10: R4.2@1600,2100 1600,1919.88 RSTP164.1@1619.88,1900 ; R3.2@1600,3200 1600,3019.88 RSTP163.1@1619.88,3000 1667.5,3000 1667.5,3027.5 v1(1630,3065) ; R2.2@1600,4300 1600,4247.89 1620,4227.89 1620,4100 RSTP162.1@1619.88,4100 1604,4100 v1(1604,4182.88) ; R1.2@1600,5400 1600,5219.88 RSTP161.1@1619.88,5200 1672,5200 1722,5250 1722,5773 v1(1824,5875) ; R8.2@2700,2100 2700,1919.88 GSTP164.1@2719.88,1900 2788,1900 2813,1925 2813,2996 2809,3000 GSTP163.1@2719.88,3000 2700,3019.88 R7.2@2700,3200 ; R6.2@2700,4300 GSTP162.1@2700,4100 ; GSTP162.1@2719.88,4100 GSTP162.1@2700,4100 ; GSTP161.1@2719.88,5200 2732,5200 2764,5232 2764,5500 C5.1@2800,5500 3150,5850 ; v1(2722,4144) 2712.5,4144 2701.48,4105.23 GSTP162.1@2700,4100 ; v1(3583.5,3178) 3761.5,3000 BSTP163.1@3819,3000 ; R12.2@3800,2100 3800,1917.94 3817.94,1900 BSTP164.1@3819.88,1900 3854,1900 v1(3854,2039) ; R11.2@3800,3200 3800,3019 BSTP163.1@3819,3000 ; R10.2@3800,4300 3800,4119.88 BSTP162.1@3819.88,4100 3819.88,4220.88 v1(3825,4226) ; BSTP163.1@3819.88,3000 BSTP163.1@3819,3000 ; BSTP161.1@3819.88,5200 3875,5200 v1(3897,5222) 3900,5225 C9.1@3900,5500
  Bottom Layer w10: R4.2@1600,2100 C4.1@1700,2200 1951,2451 1951,2819 1705,3065 v1(1630,3065) ; R3.2@1600,3200 C3.1@1700,3300 1787,3300 2202,3715 2202,3866.78 2150,3918.78 2050.22,3918.78 1786.12,4182.88 v1(1604,4182.88) ; R2.2@1600,4300 C2.1@1700,4400 1664,4436 1189,4436 1125,4500 1125,5400 1600,5875 v1(1824,5875) ; R1.2@1600,5400 C1.1@1700,5500 1755,5445 1955,5445 1988,5478 2622,5478 R5.2@2700,5400 C5.1@2800,5500 ; R8.2@2700,2100 C8.1@2800,2200 2913,2200 2968,2255 3346,2255 ; R7.2@2700,3200 C7.1@2800,3300 2880,3300 2974,3394 3102,3394 3133,3425 3133,3569 3108,3594 3108,3909.98 2913.44,4104.54 2761.46,4104.54 v1(2722,4144) ; R6.2@2700,4300 C6.1@2800,4400 ; 3150,5850 3224,5924 3837,5924 4155,5606 4155,5475 4080,5400 R9.2@3800,5400 C9.1@3900,5500 ; v1(3583.5,3178) 3350,3178 3300,3128 3300,2292 3346,2255 ; R12.2@3800,2100 C12.1@3900,2200 3693,2200 ; R11.2@3800,3200 3800,3213 3867,3280 3880,3280 C11.1@3900,3300 3980,3380 4141,3380 4169,3408 4169,4157 4100,4226 v1(3825,4226) ; R10.2@3800,4300 C10.1@3900,4400 3955,4345 4145,4345 4155,4355 4363,4355 4368,4350 4498,4350 4523,4375 4523,5201 4502,5222 v1(3897,5222) ; v1(3854,2039) 3693,2200 ; 3346,2255 3392,2200 3401,2200 ; 3346,2255 3401,2200 ; 3401,2200 3693,2200
GOUT0: GOUTH1.1 GSTP161.5 | length 839.3
  Top Layer w10: GSTP161.5@2719.88,5000 2778,5000 v1(2811,5033)
  Bottom Layer w10: GOUTH1.1@2300,5325 2350,5275 2350,5100 2375,5075 2456,5075 2498,5033 v1(2811,5033)
GOUT1: GOUTH1.2 GSTP161.6 | length 560.5
  Top Layer w10: GOUTH1.2@2400,5325 2425.47,5299.53 2450,5299.53 2474.53,5275 2474.53,5129.47 2654,4950 GSTP161.6@2719.88,4950
GOUT2: GOUTH1.3 GSTP161.7 | length 697.8
  Top Layer w10: GOUTH1.3@2300,5225 2250.47,5175.47 2250.47,5100 2275.47,5075 2462,5075 2637,4900 GSTP161.7@2719.88,4900
GOUT3: GOUTH1.4 GSTP161.8 | length 852.6
  Top Layer w10: GSTP161.8@2719.88,4850 v1(2811,4850)
  Bottom Layer w10: GOUTH1.4@2400,5225 2542,5083 2840.5,5083 2861,5062.5 2861,4900 v1(2811,4850)
GOUT4: GOUTH1.5 GSTP161.9 | length 937.7
  Top Layer w10: GSTP161.9@2719.88,4800 2836,4800 2861,4825 2861,4900 2819,4942 v1(2811,4942)
  Bottom Layer w10: GOUTH1.5@2300,5125 2300,5092.26 2322.38,5092.26 2350,5064.64 2350,5000 2375,4975 2778,4975 v1(2811,4942)
GOUT5: GOUTH1.6 GSTP161.10 | length 1775.5
  Top Layer w10: GOUTH1.6@2400,5125 2420,5125 2420,5170.47 2449.53,5200 2449.53,5250 2425,5274.53 2275,5274.53 2225.47,5225 2225.47,4725 2275.47,4675 2439.22,4675 2520.05,4594.17 2810.16,4594.17 2810.16,4713.34 2773.5,4750 GSTP161.10@2719.88,4750
GOUT6: GOUTH1.7 GSTP161.11 | length 875.8
  Top Layer w10: GOUTH1.7@2300,5025 2300,4992 2325,4992 2350,4967 2350,4900 2375,4875 2429,4875 2504,4800 2504,4749.5 2634.33,4619.17 2785.16,4619.17 2785.16,4680 2774,4680 2754,4700 GSTP161.11@2719.88,4700
GOUT7: GOUTH1.8 GSTP161.12 | length 531.1
  Top Layer w10: GOUTH1.8@2400,5025 2604.35,4820.65 2604.35,4725.26 2679.61,4650 GSTP161.12@2719.88,4650
GOUT8: GOUTH1.9 GSTP161.13 | length 2281.6
  Top Layer w10: GSTP161.13@3080.12,4650 3115,4650 3115,4514.5 3137.5,4492 v1(3228,4492)
  Bottom Layer w10: GOUTH1.9@2300,4925 2250.47,4974.53 2250.47,5375 2450,5375 2692,5133 2886,5133 3228,4791 v1(3228,4492)
GOUT9: GOUTH1.10 GSTP161.14 | length 793.8
  Top Layer w10: GOUTH1.10@2400,4925 2451,4925 2554,4822 v1(2554,4787) ; v1(2989,4700) GSTP161.14@3080.12,4700
  Bottom Layer w10: v1(2554,4787) 2641,4700 v1(2989,4700)
GOUT10: GOUTH1.11 GSTP161.15 | length 1088.6
  Top Layer w10: GSTP161.15@3080.12,4750 v1(3177.4,4750)
  Bottom Layer w10: GOUTH1.11@2300,4825 2350,4775 2465.95,4775 2590.95,4650 3077.4,4650 v1(3177.4,4750)
GOUT11: GOUTH1.12 GSTP161.16 | length 721.1
  Top Layer w10: v1(2989,4775) 3014,4800 GSTP161.16@3080.12,4800
  Bottom Layer w10: GOUTH1.12@2400,4825 2492.35,4825 2504.35,4837 2657.17,4837 2719.17,4775 v1(2989,4775)
GOUT12: GOUTH1.13 GSTP161.17 | length 1038
  Top Layer w10: v1(2990,4850) GSTP161.17@3080.12,4850
  Bottom Layer w10: GOUTH1.13@2300,4725 2250,4775 2250,4850 2275,4875 2686,4875 2761,4800 2940,4800 v1(2990,4850)
GOUT13: GOUTH1.14 GSTP161.18 | length 1305.1
  Top Layer w10: GSTP161.18@3080.12,4900 3225,4900 3275,4850 3275,4725 v1(3167,4617)
  Bottom Layer w10: GOUTH1.14@2400,4725 2508,4617 v1(3167,4617)
GOUT14: GOUTH1.15 GSTP161.19 | length 1562.7
  Top Layer w10: GSTP161.19@3080.12,4950 3263,4950 3300,4913 3300,4675 v1(3167,4542)
  Bottom Layer w10: GOUTH1.15@2300,4625 2383,4542 v1(3167,4542)
GOUT15: GOUTH1.16 GSTP161.20 | length 1992.1
  Top Layer w10: v1(2990,5135) 2990,5032 3022,5000 GSTP161.20@3080.12,5000
  Bottom Layer w10: GOUTH1.16@2400,4625 2350,4675 2250,4675 2225,4700 2225,5395.6 2238.4,5409 2515,5409 2766,5158 2967,5158 v1(2990,5135)
GOUT16: GOUTH2.1 GSTP162.5 | length 617.2
  Top Layer w10: GOUTH2.1@2300,4225 2350,4175 2450,4175 2533,4092 2533,3985 2618,3900 GSTP162.5@2719.88,3900
GOUT17: GOUTH2.2 GSTP162.6 | length 582.4
  Top Layer w10: v1(2567,3875) 2648,3875 2673,3850 GSTP162.6@2719.88,3850
  Bottom Layer w10: GOUTH2.2@2400,4225 2567,4058 v1(2567,3875)
GOUT18: GOUTH2.3 GSTP162.7 | length 657
  Top Layer w10: v1(2623,3814) 2637,3800 GSTP162.7@2719.88,3800
  Bottom Layer w10: GOUTH2.3@2300,4125 2350,4075 2350,3900 2375,3875 2434,3875 2495,3814 v1(2623,3814)
GOUT19: GOUTH2.4 GSTP162.8 | length 621.7
  Top Layer w10: GOUTH2.4@2400,4125 2425.47,4099.53 2450,4099.53 2499.53,4050 2499.53,3800 2549.53,3750 GSTP162.8@2719.88,3750
GOUT20: GOUTH2.5 GSTP162.9 | length 799
  Top Layer w10: GOUTH2.5@2300,4025 2300,4062.03 2312.5,4074.53 2425,4074.53 2474.53,4025 2474.53,3714.7 2489.23,3700 GSTP162.9@2719.88,3700
GOUT21: GOUTH2.6 GSTP162.10 | length 642.6
  Top Layer w10: GOUTH2.6@2400,4025 2449.53,3975.47 2449.53,3689.7 2489.23,3650 GSTP162.10@2719.88,3650
GOUT22: GOUTH2.7 GSTP162.11 | length 744.8
  Top Layer w10: v1(2605,3600) GSTP162.11@2719.88,3600
  Bottom Layer w10: GOUTH2.7@2300,3925 2300,3892.26 2314.48,3892.26 2350,3856.75 2350,3600 2375,3575 2580,3575 v1(2605,3600)
GOUT23: GOUTH2.8 GSTP162.12 | length 677.7
  Top Layer w10: GOUTH2.8@2400,3925 2350,3875 2350,3700 2375.47,3674.53 2425,3674.53 2549.53,3550 GSTP162.12@2719.88,3550
GOUT24: GOUTH2.9 GSTP162.13 | length 1325.5
  Top Layer w10: v1(2958,3455) 2958,3530 2978,3550 GSTP162.13@3080.12,3550
  Bottom Layer w10: GOUTH2.9@2300,3825 2227,3752 2227,3698.74 2225.47,3697.21 2225.47,3519.53 2319.53,3425.47 2928.47,3425.47 v1(2958,3455)
GOUT25: GOUTH2.10 GSTP162.14 | length 1507.4
  Top Layer w10: v1(3058,3475) 2988,3405 2925,3405 2908,3422 2908,3517 2991,3600 GSTP162.14@3080.12,3600
  Bottom Layer w10: GOUTH2.10@2400,3825 2461.75,3763.25 2706.54,3763.25 2768.29,3825 2991,3825 3058,3758 v1(3058,3475)
GOUT26: GOUTH2.11 GSTP162.15 | length 1125.1
  Top Layer w10: v1(2998,3650) GSTP162.15@3080.12,3650
  Bottom Layer w10: GOUTH2.11@2300,3725 2250.47,3675.47 2250.47,3600 2275.47,3575 2320.04,3575 2350,3545.04 2350,3500.47 2375,3475.47 2597.15,3475.47 2661.68,3540 2888,3540 v1(2998,3650)